# EAGLE board GH_Terra_pre (EAGLE 6.5.0)
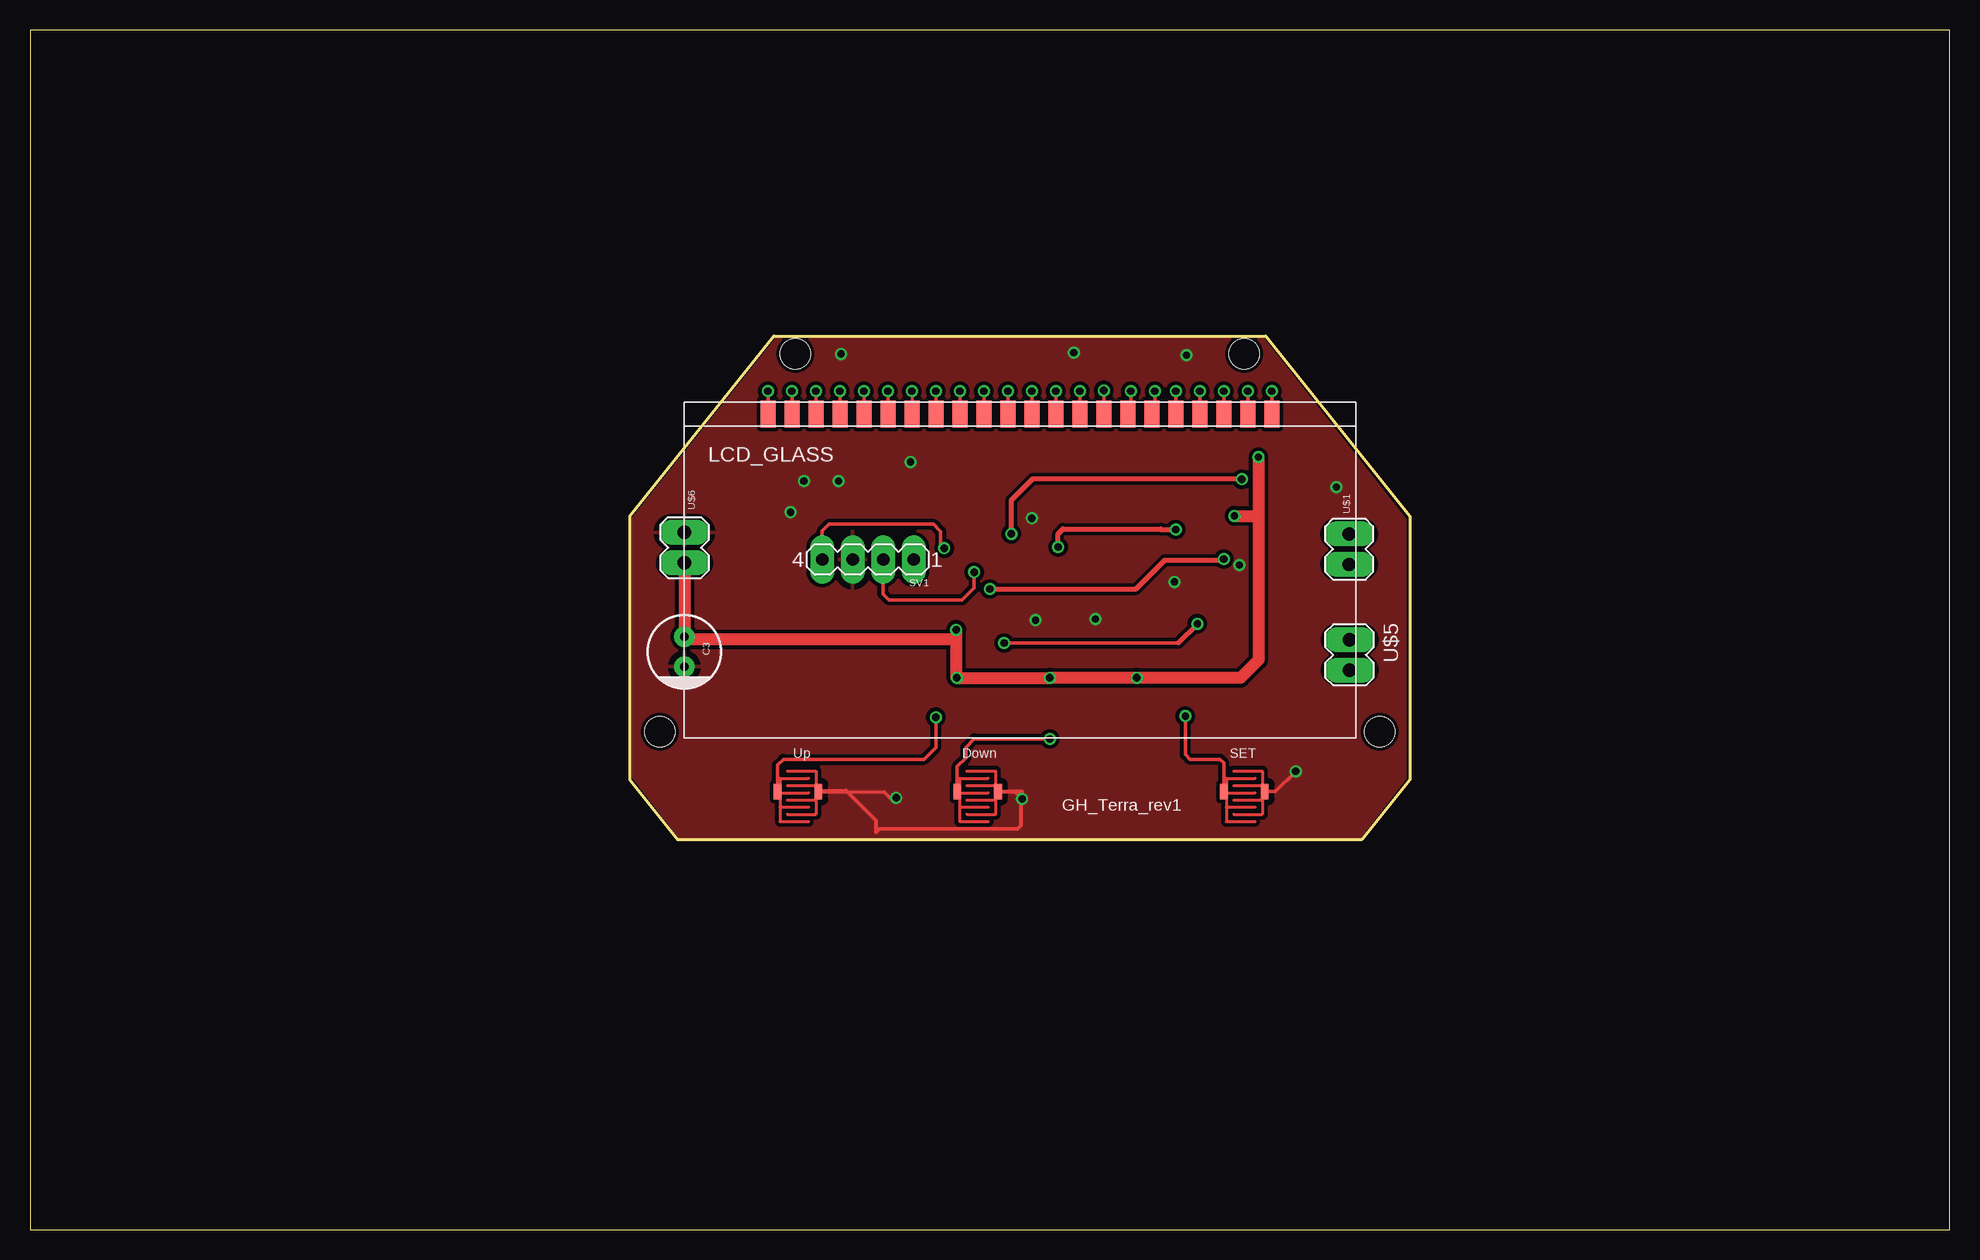
[diagram p0: board, top side]
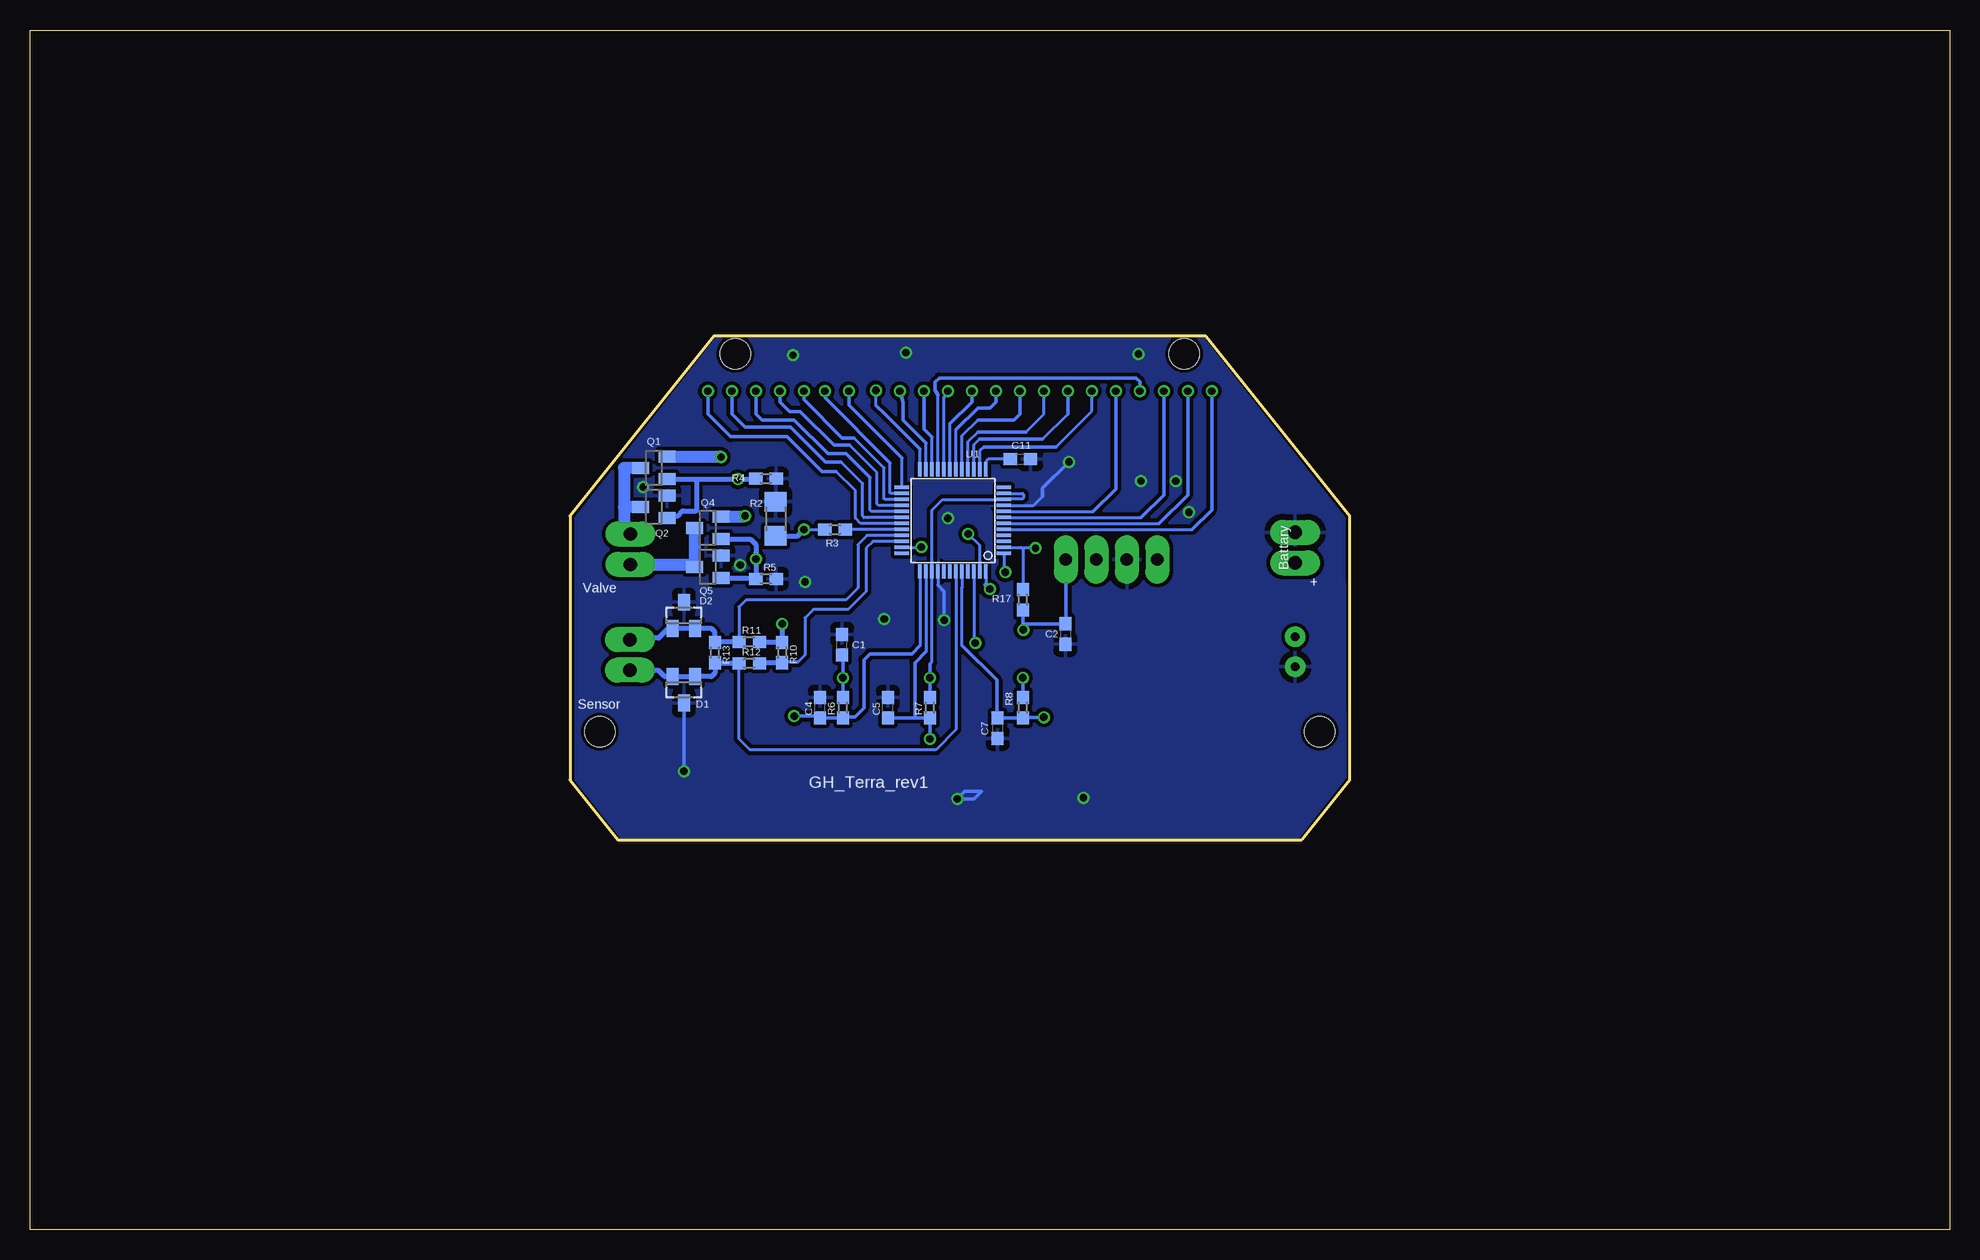
[diagram p1: board, bottom side, seen from below]

Size 160 x 100 mm. Coordinates in mm from the lower left corner, seen from the top.
Outline: 0,0 160,0 160,100 0,100 0,0
Copper layers (1+16): Top 0.018mm / dielectric 1.5mm / Bottom 0.018mm
Design rules "5529 Design Rules": minimum track width 0.15mm, minimum drill 0.3mm, track to track 0.2mm, track to pad 0.2mm, pad to pad 0.2mm, via to via 0.2mm, smd to smd 0.2mm, copper to edge 0.25mm, drill to drill 0.2mm, minimum pad ring 0.5mm, minimum via ring 0.2mm, stop-mask expansion 0.08mm, vias tented up to drill 0.3mm, thermal gap 0.5mm
Holes 2.5 mm at 112.5,41.5 52.5,41.5 101.2,73 63.8,73
Milling: 8 lines

## Footprints (pad centres in the part's own frame; a part is rotated, then mirrored left to right if it is on the bottom)
C0603_IPC = smd 1.1 x 1: 1 -0.85,0; 2 0.85,0
SANYO-OSCON_C6 = drill 0.7 pad 1.27: + 1.25,0; - -1.25,0
SOT23 = smd 1 x 1.4: 1 -0.95,-1.1; 2 0.95,-1.1; 3 0,1.1
CHT2623 = smd 1.25 x 2.25: C1 7,27; C2 9,27; C3 11,27; C4 13,27; S1 15,27; S2 17,27; S3 19,27; S4 21,27; S5 23,27; S6 25,27; S7 27,27; S8 29,27; S9 31,27; S10 33,27; S11 35,27; S12 37,27; S13 39,27; S14 41,27; S15 43,27; S16 45,27; S17 47,27; S18 49,27
R1206 = smd 1.6 x 1.803: 1 -1.422,0; 2 1.422,0
R0603_IPC = smd 1.1 x 1: 1 -0.85,0; 2 0.85,0
MA04-1 = drill 1.016 long: 1 -3.81,0; 2 -1.27,0; 3 1.27,0; 4 3.81,0
LQFP48 = smd 0.3 x 1.2: 1 -2.75,-4.25; 2 -2.25,-4.25; 3 -1.75,-4.25; 4 -1.25,-4.25; 5 -0.75,-4.25; 6 -0.25,-4.25; 7 0.25,-4.25; 8 0.75,-4.25; 9 1.25,-4.25; 10 1.75,-4.25; 11 2.25,-4.25; 12 2.75,-4.25; 25 2.75,4.25; 26 2.25,4.25; 27 1.75,4.25; 28 1.25,4.25; 29 0.75,4.25; 30 0.25,4.25; 31 -0.25,4.25; 32 -0.75,4.25; 33 -1.25,4.25; 34 -1.75,4.25; 35 -2.25,4.25; 36 -2.75,4.25 | smd 1.2 x 0.3: 13 4.25,-2.75; 14 4.25,-2.25; 15 4.25,-1.75; 16 4.25,-1.25; 17 4.25,-0.75; 18 4.25,-0.25; 19 4.25,0.25; 20 4.25,0.75; 21 4.25,1.25; 22 4.25,1.75; 23 4.25,2.25; 24 4.25,2.75; 37 -4.25,2.75; 38 -4.25,2.25; 39 -4.25,1.75; 40 -4.25,1.25; 41 -4.25,0.75; 42 -4.25,0.25; 43 -4.25,-0.25; 44 -4.25,-0.75; 45 -4.25,-1.25; 46 -4.25,-1.75; 47 -4.25,-2.25; 48 -4.25,-2.75
MA02-1 = drill 1.1 long: 1 -1.27,0; 2 1.27,0
RK_3X4 = smd 0.635 x 1.27: P$1 -0.2,-1.7; P$2 3.2,-1.7

## Placement (x,y rotation side)
C1  CC0603JRX7R9BB104  [C0603_IPC]  92.3,48.75 90 bottom
C2  CC0603JRX7R9BB104  [C0603_IPC]  73.7,49.65 270 bottom
C3  SH063M0010B2F-0511  [SANYO-OSCON_C6]  54.55,48.17 90 top
C4  CC0603GRNPO9BN220  [C0603_IPC]  94.15,43.5 90 bottom
C5  CC0603GRNPO9BN220  [C0603_IPC]  88.5,43.5 90 bottom
C7  CC0603GRNPO9BN220  [C0603_IPC]  79.35,41.8 270 bottom
C11  CC0603KRX5R7BB105  [C0603_IPC]  77.45,64.22 0 bottom
D1  ESDA14V2L  [SOT23]  105.5,45 180 bottom
D2  ESDA14V2L  [SOT23]  105.5,51.2 0 bottom
LCD1  CHT2623  [CHT2623]  54.5,41 0 top
Q1  IRLML5203TRPBF  [SOT23]  108,63.5 90 bottom
Q2  IRLML2030TRPBF  [SOT23]  108,60.25 90 bottom
Q4  IRLML5203TRPBF  [SOT23]  103.5,58.5 90 bottom
Q5  IRLML2030TRPBF  [SOT23]  103.5,55.25 90 bottom
R2  B57621C0103J062  [R1206]  97.85,59.25 90 bottom
R3  CR0603-FX-1002ELF  [R0603_IPC]  92.9,58.35 180 bottom
R4  RC0603FR-0727KL  [R0603_IPC]  98.65,62.6 180 bottom
R5  RC0603FR-0727KL  [R0603_IPC]  98.65,54.25 0 bottom
R6  RC0603FR-07100KL  [R0603_IPC]  92.25,43.5 90 bottom
R7  RC0603FR-07100KL  [R0603_IPC]  85,43.5 90 bottom
R8  RC0603FR-07100KL  [R0603_IPC]  77.25,43.5 90 bottom
R10  RC0603FR-0727KL  [R0603_IPC]  97.3,48.1 270 bottom
R11  RC0603FR-0727KL  [R0603_IPC]  100.05,49 0 bottom
R12  RC0603FR-0727KL  [R0603_IPC]  100.05,47.2 0 bottom
R13  RC0603FR-0727KL  [R0603_IPC]  102.9,48.1 270 bottom
R17  RC0603FR-07100KL  [R0603_IPC]  77.25,52.5 90 bottom
SV1  [MA04-1]  69.85,55.86 180 top
U1  STM8L152C6T6  [LQFP48]  83.08,59.11 90 bottom
U$1  MA02-1  [MA02-1]  109.95,56.72 90 top
U$2  [RK_3X4]  99.72,38.21 0 top
U$3  [RK_3X4]  77.49,38.21 0 top
U$4  [RK_3X4]  62.51,38.21 0 top
U$5  MA02-1  [MA02-1]  110,47.9 270 top
U$6  MA02-1  [MA02-1]  54.55,56.85 90 top

## Library data of the parts
C1-C5 C7 C11 R2-R8 R10-R13 R17 = rcl
D1 D2 = diode
LCD1 = lcd_glass
Q1 Q2 Q4 Q5 = semiconductor
SV1 U$1 U$5 U$6 = con-lstb
U1 = st-microelectronics
U$2-U$4 = rubber_key

## Nets
GND: C1.2 C2.2 C3.- C4.2 C5.2 C7.2 C11.2 D1.3 D2.3 Q2.2 Q5.2 R2.2 R4.1 R5.2 SV1.3 U1.9 U1.40 U$2.P$2 U$3.P$2 U$4.P$2 U$6.2
MCC: U1.36
N$2: Q1.3 Q2.3 U$1.2
N$3: Q4.3 Q5.3 U$1.1
N$7: LCD1.C1 U1.5
N$8: LCD1.C2 U1.6
N$9: LCD1.C3 U1.7
N$10: LCD1.C4 U1.21
N$11: LCD1.S1 U1.8
N$12: LCD1.S2 U1.14
N$13: LCD1.S3 U1.15
N$14: LCD1.S4 U1.16
N$15: LCD1.S5 U1.17
N$16: LCD1.S6 U1.18
N$17: LCD1.S7 U1.19
N$18: LCD1.S8 U1.20
N$19: LCD1.S9 U1.22
N$20: LCD1.S10 U1.23
N$21: LCD1.S11 U1.24
N$22: LCD1.S12 U1.25
N$23: LCD1.S13 U1.26
N$24: LCD1.S14 U1.27
N$25: LCD1.S15 U1.28
N$26: LCD1.S16 U1.29
N$27: D2.1 D2.2 R11.1 R13.1 U1.33 U$5.1
N$28: R10.2 R12.2 U1.34
N$29: LCD1.S17 U1.30
N$30: C4.1 R6.1 U1.37 U$2.P$1
N$31: C5.1 R7.1 U1.38 U$3.P$1
N$32: C7.1 R8.1 U1.44 U$4.P$1
N$34: LCD1.S18 U1.31
POWER_TEMP: R3.1 U1.32
RESET: R17.2 SV1.4 U1.2
SWIM: SV1.2 U1.1
TEMP_ADC: R2.1 R3.2 U1.35
VALVE_CLOSE: Q4.1 Q5.1 R5.1 U1.48
VALVE_OPEN: Q1.1 Q2.1 R4.2 U1.47
VCC: C1.1 C2.1 C3.+ Q1.2 Q4.2 R6.2 R7.2 R8.2 R17.1 SV1.1 U1.10 U1.11 U1.39 U$6.1
VLCD: C11.1 U1.13
VREF: R10.1 R11.2 U1.46
VREF1: D1.1 D1.2 R12.1 R13.2 U1.43 U$5.2
VREF+: U1.12

## Tracks (layer width: path | path; a pad name or v marks a point on that pad's centre or on a via)
GND  (via drill 0.6)
  Top 0.254: 71.2,36.5 U$4.P$2 65.8,36.6 68,36.6
  Top 0.305: U$2.P$2 103.81,36.51 v105.5,38.2 | U$3.P$2 82.69,36.51 82.7,36.5 v82.7,35.9 82.1,36.5 | 71.2,36.5 71.7,36 v72.2,36 | 68,36.6 70.5,34.1 70.5,33.1 70.8,33.4 82.3,33.4 82.6,33.7 82.6,36.1 82.2,36.5 82.1,36.5 | 82.1,36.5 80.6,36.5
  Bottom 0.254: U1.40 84.33,53.73 | U1.9 76.34,60.36 75.6,61.1
  Bottom 0.305: 84.33,53.73 83.8,53.2 v83.8,50.8 | v105.5,38.2 D1.3 | 75.6,61.1 75.6,61.8 v73.4,64 | v82.7,35.9 81.3,35.9 U$3.P$2 82.09,36.51 v82.7,35.9
  other vias: 63.4,59.8 96.4,72.9 67.6,73 87,73.1 67.4,62.4 64.5,62.4 95.4,54 88.8,50.9 100.8,55.4 108.9,61.9 83.5,59.3
  pour Top (isolate 0.305): 50.3,37.7 50.3,59.3 62.2,74.2 102.8,74.2 114.6,59.2 114.6,37.6 110.8,32.7 54.2,32.7
  pour Bottom (isolate 0.305): 50.4,37.7 50.5,59.3 62.2,74.2 102.8,74.2 114.5,59.3 114.5,37.5 110.7,32.7 54.3,32.7
N$2
  Bottom 0.406: 110.45,60.25 110.5,60.2
  Bottom 1.016: Q1.3 110.5,63.5 110.5,60.2 110.5,58.54 U$1.2 | Q2.3 110.45,60.25
N$3
  Bottom 0.406: 104.8,55.45 Q5.3
  Bottom 1.016: Q4.3 Q5.3 | U$1.1 104.8,55.45
N$7  (via drill 0.6)
  Top 0.305: v61.5,69.9 LCD1.C1
  Bottom 0.254: U1.5 63.14,58.36
  Bottom 0.305: 63.14,58.36 61.5,60 v61.5,69.9
N$8  (via drill 0.6)
  Top 0.305: v63.5,69.9 LCD1.C2
  Bottom 0.254: U1.6 65.89,58.86
  Bottom 0.305: 65.89,58.86 63.5,61.25 v63.5,69.9
N$9  (via drill 0.6)
  Top 0.305: v65.5,69.9 LCD1.C3
  Bottom 0.254: U1.7 67.39,59.36
  Bottom 0.305: 67.39,59.36 65.5,61.25 v65.5,69.9
N$10  (via drill 0.6)
  Top 0.305: v67.5,69.9 LCD1.C4
  Bottom 0.254: U1.21 84.33,69.58
  Bottom 0.305: 84.33,69.58 84.55,70 84.55,70.65 84.2,71 67.8,71 67.5,70.7 v67.5,69.9
N$11  (via drill 0.6)
  Top 0.305: v69.5,69.9 LCD1.S1
  Bottom 0.254: U1.8 71.39,59.86
  Bottom 0.305: 71.39,59.86 69.5,61.75 v69.5,69.9
N$12  (via drill 0.6)
  Top 0.305: v71.5,69.9 LCD1.S2
  Bottom 0.254: U1.14 80.83,64.92 80.5,65.25 | 74.5,65.25 71.5,68.25 v71.5,69.9
  Bottom 0.305: 80.5,65.25 74.5,65.25
N$13  (via drill 0.6)
  Top 0.254: v73.5,69.9 LCD1.S3
  Bottom 0.254: U1.15 81.33,65.42 80.85,65.9 | 75.6,65.9 LCD1.S3
  Bottom 0.305: 80.85,65.9 75.6,65.9 | LCD1.S3 v73.5,69.9
N$14  (via drill 0.6)
  Top 0.305: v75.5,69.9 LCD1.S4
  Bottom 0.254: U1.16 81.83,65.67 81,66.5 | 77,66.5 LCD1.S4 v75.5,69.9
  Bottom 0.305: 81,66.5 77,66.5
N$15  (via drill 0.6)
  Top 0.305: v77.5,69.9 LCD1.S5
  Bottom 0.254: U1.17 82.33,66.17 81,67.5
  Bottom 0.305: 81,67.5 78,67.5 LCD1.S5 v77.5,69.9
N$16  (via drill 0.6)
  Top 0.305: v79.5,69.9 LCD1.S6
  Bottom 0.254: U1.18 82.83,66.67
  Bottom 0.305: 82.83,66.67 81,68.5 80,68.5 79.5,69 v79.5,69.9
N$17  (via drill 0.6)
  Top 0.305: v81.5,69.9 LCD1.S7
  Bottom 0.254: U1.19 83.33,67.17
  Bottom 0.305: 83.33,67.17 81.5,69 v81.5,69.9
N$18  (via drill 0.6)
  Top 0.305: v83.5,69.9 LCD1.S8
  Bottom 0.254: U1.20 83.83,69.37 v83.5,69.9
N$19  (via drill 0.6)
  Top 0.305: v85.5,69.9 LCD1.S9
  Bottom 0.254: U1.22 84.83,66.08
  Bottom 0.305: 84.83,66.08 85.5,66.75 v85.5,69.9
N$20  (via drill 0.6)
  Top 0.305: v87.5,69.9 LCD1.S10
  Bottom 0.254: U1.23 85.33,65.58
  Bottom 0.305: 85.33,65.58 87.25,67.5 87.25,69 v87.5,69.9
N$21  (via drill 0.6)
  Top 0.305: v89.5,69.95 LCD1.S11
  Bottom 0.254: U1.24 85.83,65.08 | 89.5,68.7 v89.5,69.95
  Bottom 0.305: 85.83,65.08 88.75,68 89.5,68.7
N$22  (via drill 0.6)
  Top 0.305: v91.75,69.9 91.75,68.25 LCD1.S12
  Bottom 0.254: U1.25 87.33,64.33
  Bottom 0.305: 87.33,64.33 91.75,68.75 v91.75,69.9
N$23  (via drill 0.6)
  Top 0.305: v93.75,69.9 93.75,68.25 LCD1.S13
  Bottom 0.254: U1.26 88.26,61.36 88.3,61.4 88.3,63.9
  Bottom 0.305: 88.3,63.9 93.75,69.35 v93.75,69.9
N$24  (via drill 0.6)
  Top 0.305: v95.5,69.9 LCD1.S14
  Bottom 0.254: U1.27 88.76,60.86 88.8,60.9 88.8,63.5 91.3,66 | 95.5,69.2 v95.5,69.9
  Bottom 0.305: 95.5,69.25 v95.5,69.9 | 91.3,66 92.3,66 95.5,69.2
N$25  (via drill 0.6)
  Top 0.305: v97.5,69.9 LCD1.S15
  Bottom 0.254: U1.28 89.26,60.36 89.4,60.5 89.4,63.1 91.7,65.4
  Bottom 0.305: 91.7,65.4 93,65.4 95.8,68.2 96.7,68.2 97.5,69 v97.5,69.9
N$26  (via drill 0.6)
  Top 0.305: v99.5,69.9 LCD1.S16
  Bottom 0.254: U1.29 89.86,59.86 90,60 90,62.7
  Bottom 0.305: 90,62.7 92,64.7 93.5,64.7 96.3,67.5 99,67.5 LCD1.S16 v99.5,69.9
N$27
  Bottom 0.254: D2.1 106.8,50.1 | 109.87,49.3 U$5.1 | 102.85,49 R13.1 | U1.33 90.24,57.86 91,57.1 91,53.5 92,52.5 100.3,52.5 100.9,51.9 R11.1
  Bottom 0.406: D2.1 D2.2 103.2,50.1 102.9,49.8 R13.1 | 106.8,50.1 107.6,49.3 109.87,49.3 | R11.1 102.85,49
N$28
  Bottom 0.254: 99.15,47.25 R12.2 | U1.34 89.74,57.36 90.3,56.8 90.3,53.2 91.8,51.7 94.7,51.7 95.4,51 95.4,47.9 96,47.3 97.25,47.3
  Bottom 0.305: 97.25,47.3 R10.2
  Bottom 0.406: R10.2 99.15,47.25
N$29  (via drill 0.6)
  Top 0.305: v101.5,69.9 LCD1.S17
  Bottom 0.254: U1.30 90.16,59.36 90.2,59.35 90.5,59.35 90.6,59.5 90.6,62.2 92.4,64
  Bottom 0.305: 92.4,64 93.7,64 96.6,66.9 100.4,66.9 LCD1.S17 v101.5,69.9
N$30  (via drill 0.6)
  Top 0.305: 96.4,42.7 v96.3,42.8 96.3,39.6 96.7,39.2 99.2,39.2 99.52,38.88 U$2.P$1
  Bottom 0.254: U1.37 85.83,48.67
  Bottom 0.305: 85.83,48.67 86.5,48 90,48 90.5,47.5 90.5,43.5 91.25,42.75 92.15,42.75 R6.1 C4.1 94.3,42.8 v96.3,42.8
N$31  (via drill 0.6)
  Top 0.305: U$3.P$1 77.29,38.59 78,39.3 78,40.2 78.7,40.9 v85,40.9
  Bottom 0.254: U1.38 85.33,48.17
  Bottom 0.305: R7.1 86.25,42.65 | 86.25,42.65 C5.1 | 84.9,42.75 R7.1 | 85.33,48.17 86.25,47.25 86.25,42.65 | v85,40.9 R7.1
N$32  (via drill 0.6)
  Top 0.305: U$4.P$1 62.31,38.71 62.8,39.2 74.5,39.2 75.5,40.2 v75.5,42.7
  Bottom 0.254: U1.44 82.33,53.53 82.3,53.5 82.3,48.7
  Bottom 0.305: 82.3,48.7 79.4,45.8 79.4,42.7 C7.1 R8.1 77.2,42.7 v75.5,42.7
N$34  (via drill 0.6)
  Top 0.305: v103.5,69.9 LCD1.S18
  Bottom 0.254: U1.31 90.76,58.86 91.2,59.3 91.2,61.6 92.8,63.2
  Bottom 0.305: 92.8,63.2 94,63.2 96.9,66.1 101.6,66.1 LCD1.S18 v103.5,69.9
POWER_TEMP
  Bottom 0.254: U1.32 R3.1
RESET  (via drill 0.6)
  Top 0.305: SV1.4 66.04,58.24 66.6,58.8 75.3,58.8 75.9,58.2 75.9,57.1 v76.2,56.8
  Bottom 0.254: U1.2 77.36,56.86 77.25,56.75 R17.2 | v76.2,56.8 77.2,56.8
  Bottom 0.305: 77.2,56.8 77.25,56.75
SWIM  (via drill 0.6)
  Top 0.305: v78.7,54.8 78.7,53.5 77.7,52.5 71.6,52.5 71.1,53 71.1,55.84 SV1.2
  Bottom 0.254: U1.1 78.83,54.93
  Bottom 0.305: 78.83,54.93 v78.7,54.8
TEMP_ADC  (via drill 0.6)
  Top 0.254: 94.25,58.4 94.3,58.35
  Top 0.406: v85.7,56.9 85.7,58 86.1,58.4 94.25,58.4 | 94.3,58.35 v95.5,58.35
  Bottom 0.254: v95.5,58.35 R3.2 | U1.35 85.74,56.86 v85.7,56.9
  Bottom 0.406: R2.1 96.02,57.83 v95.5,58.35
VALVE_CLOSE  (via drill 0.6)
  Top 0.406: v80,53.4 92.2,53.4 94.6,55.8 99.4,55.8 v99.5,55.9
  Bottom 0.254: U1.48 80.33,53.73
  Bottom 0.406: Q5.1 99.55,54.3 R5.1 v99.5,55.9 99.5,56.4 99.5,57.1 99.95,57.55 Q4.1 | 80.33,53.73 v80,53.4
VALVE_OPEN  (via drill 0.6)
  Top 0.406: v81.8,58 81.8,60.8 83.6,62.6 100.95,62.6 v101,62.55
  Bottom 0.254: U1.47 80.83,57.03 v81.8,58
  Bottom 0.305: Q2.1 106.7,59.5
  Bottom 0.406: Q1.1 104.6,62.55 | 104.6,62.55 v101,62.55 99.55,62.55 R4.2 | 106.7,59.5 106,59.5 105.6,59.9 104.5,59.9 104.4,60 104.4,62.35 104.6,62.55
VCC  (via drill 0.6)
  Top 0.305: 77.2,46.05 v77.25,46 | 54.77,49.2 C3.+
  Top 0.406: 102.2,59.5 102.4,59.3
  Top 1.016: v77.25,46 v85,46 v92.25,46 100.9,46 102.4,47.5 102.4,59.3 v102.4,64.4 | 77.2,49.2 77.2,46.05 | v100.4,59.5 102.2,59.5 | U$6.1 C3.+ | v77.2,50 77.2,49.2 | 77.2,49.2 54.77,49.2
  Bottom 0.254: 84.85,47.3 84.85,54.84 U1.39 84.83,59.97 83.95,60.85 78.89,60.85 U1.10 78.79,60.9 77.3,60.9 77.2,61 77.2,61.3 77.26,61.36 U1.11
  Bottom 0.305: R7.2 v85,46 85,47.15 84.85,47.3 | R6.2 v92.25,46 92.25,47.85 C1.1 92.4,48 | R8.2 v77.25,46 | R17.1 77.25,50.55 | 77.25,50.55 v77.2,50 | SV1.1 73.66,50.54 C2.1 77.2,50.5 77.25,50.55
  Bottom 0.406: 102.45,64.45 v102.4,64.4 | 100.45,59.45 v100.4,59.5
  Bottom 1.016: Q1.2 102.45,64.45 | Q4.2 100.45,59.45
VLCD
  Bottom 0.254: C11.1 80.13,64.22 80.3,64 80.3,63.38 U1.13
VREF  (via drill 0.6)
  Top 0.305: v81.2,48.9 95.7,48.9
  Top 0.406: 95.7,48.9 v97.3,50.5
  Bottom 0.254: 99.15,48.95 R11.2 | U1.46 81.33,49.03
  Bottom 0.305: 81.33,49.03 v81.2,48.9
  Bottom 0.406: 99.15,48.95 R10.1 v97.3,50.5
VREF1
  Bottom 0.254: 102.85,47.2 R13.2 | 109.97,46.6 U$5.2 | U1.43 82.83,41.67 84.5,40 100,40 100.9,40.9 R12.1
  Bottom 0.406: R12.1 102.85,47.2 | 109.97,46.6 107.6,46.6 107.1,46.1 D1.2 D1.1 103.2,46.1 102.9,46.4 R13.2
VREF+
  Bottom 0.254: U1.12

## Text on the board
tPlace: GH_Terra_rev1
bPlace: GH_Terra_rev1
tNames: Up | Down | SET
bNames: Battary | + | Valve | Sensor